# Altium PCB Drone F450.PcbDoc
Units mil, origin at the board's own origin, x right, y up, seen from the top; angles counter-clockwise.
Board outline 3920 x 3920 mil, 2 copper layers (Top Layer, Bottom Layer); 17 components, 17 nets, 113 pads, 52 vias.
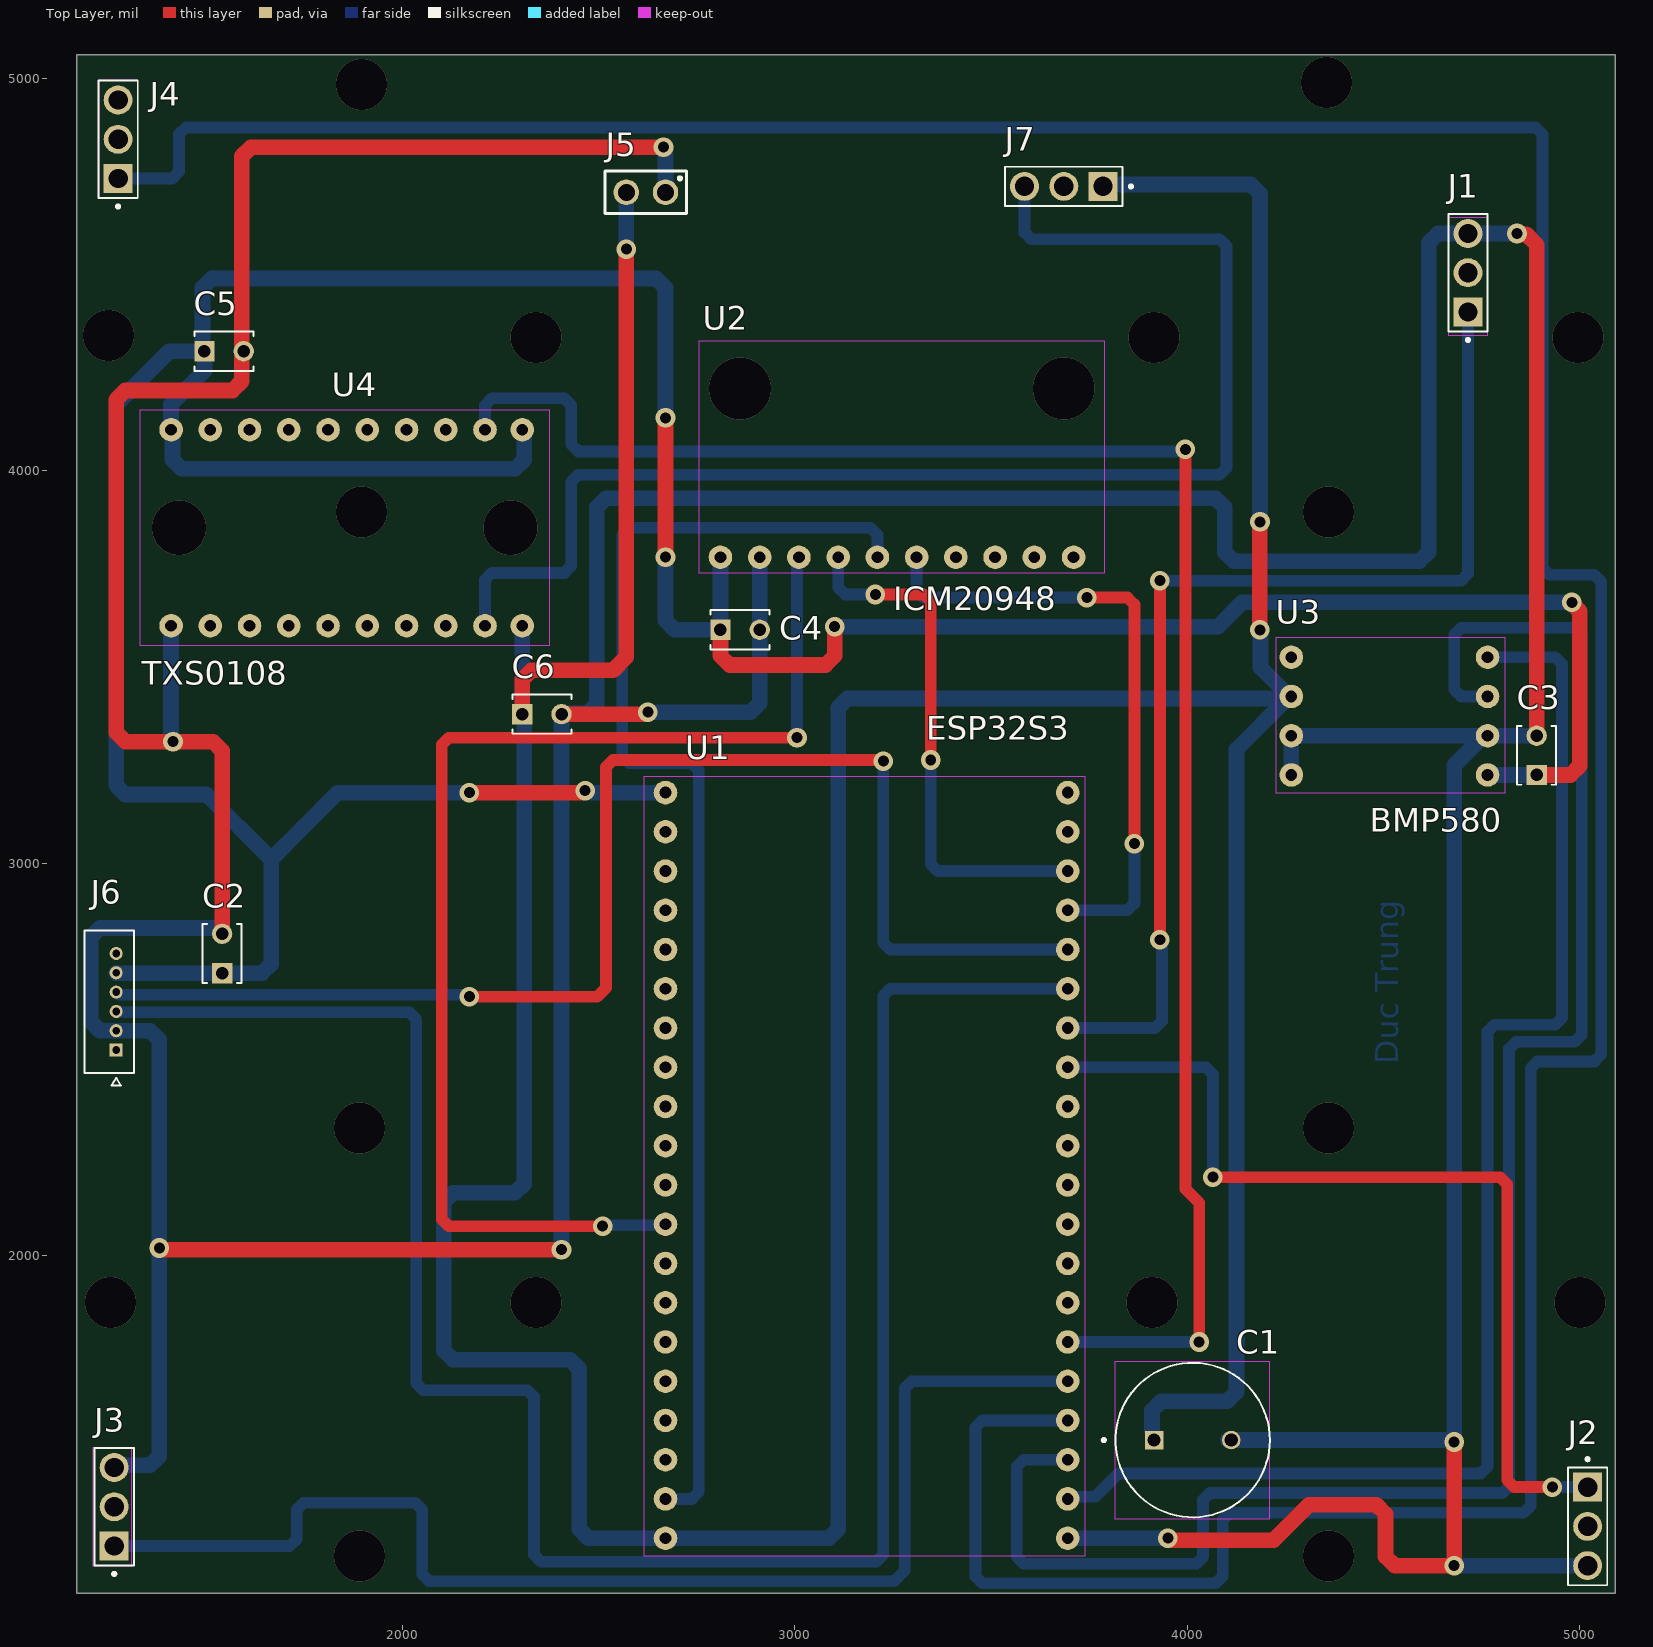
[diagram p0: Top Layer view]
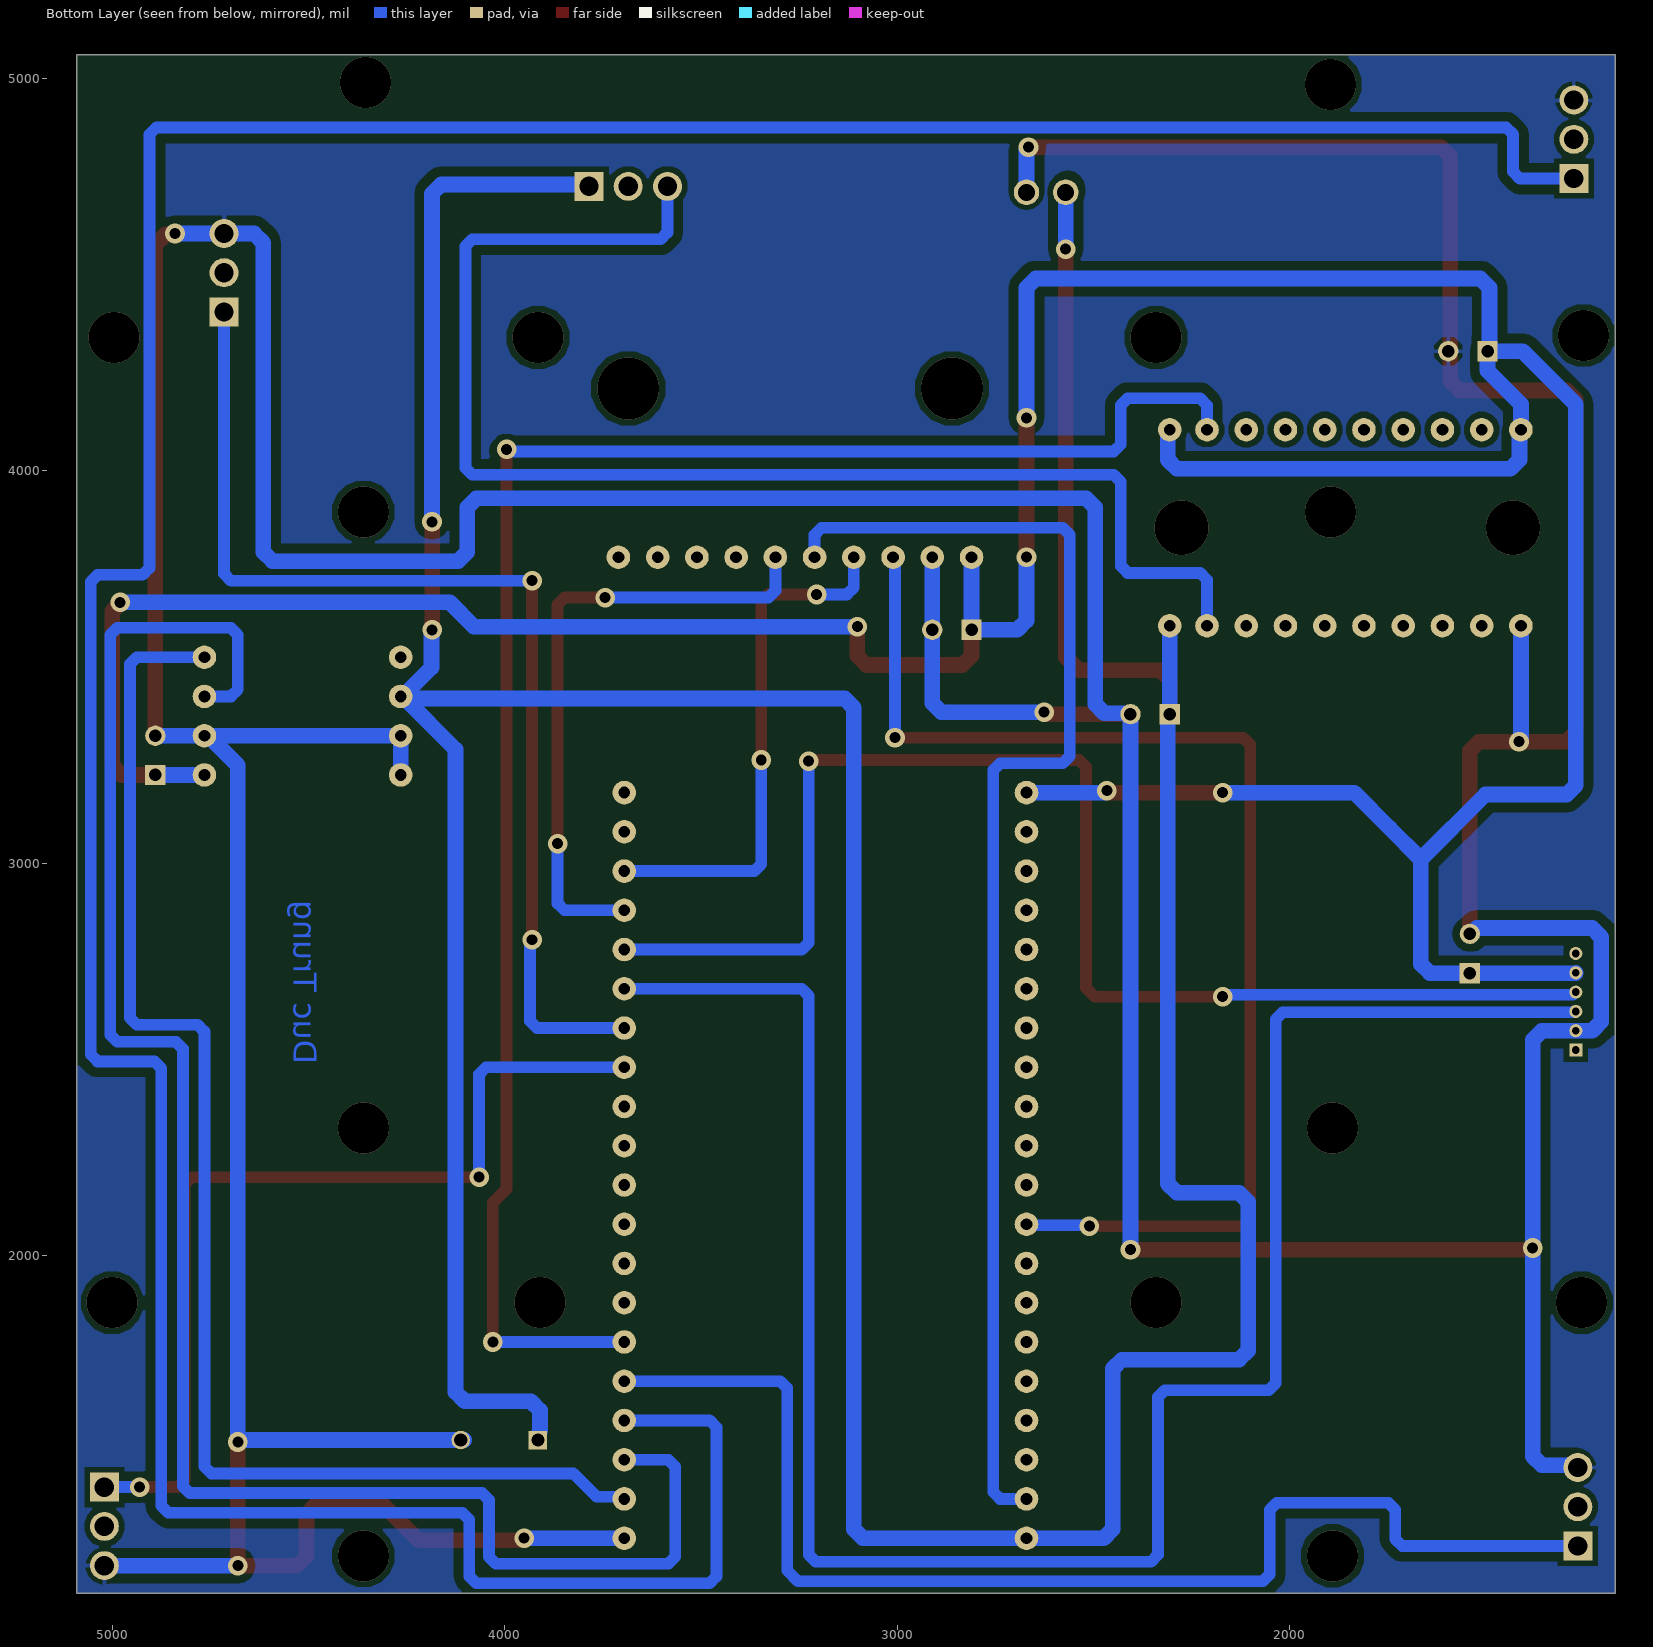
[diagram p1: Bottom Layer view, seen from below]
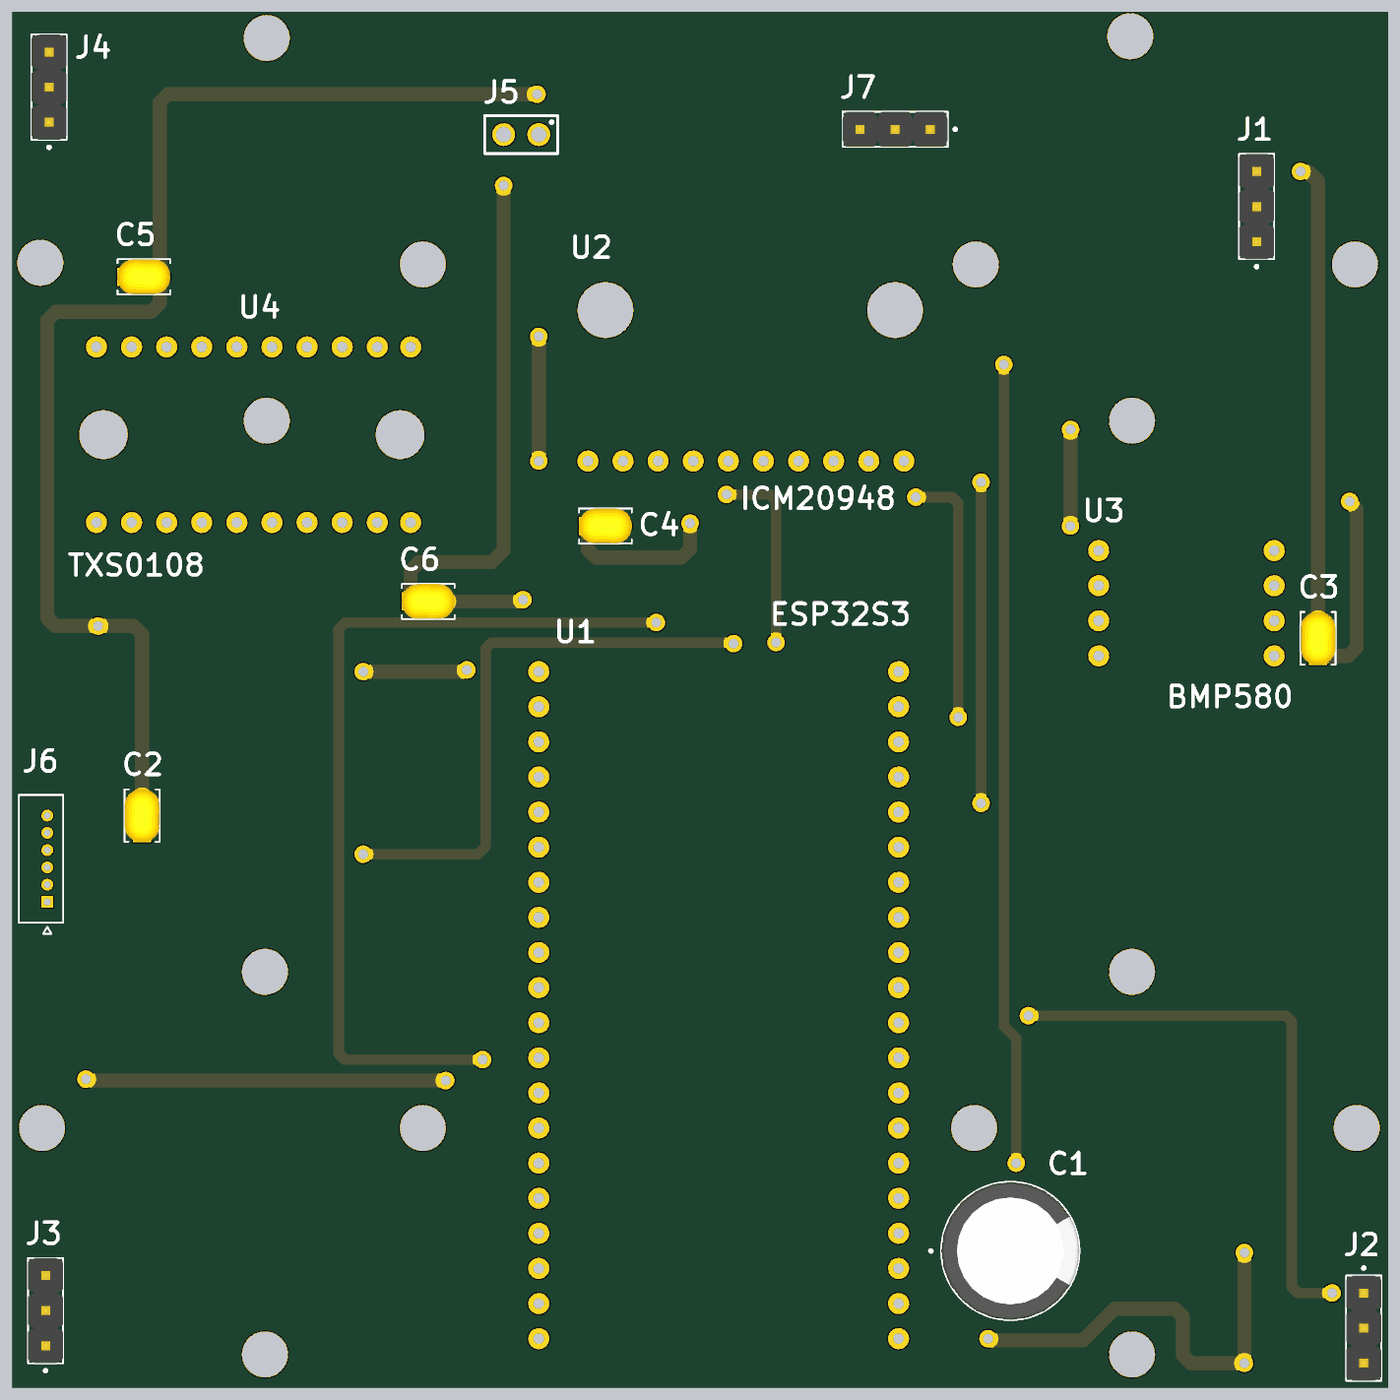
[diagram p2: 3D render of the assembled board from above, using the file's embedded part models]

## Layer stack, top to bottom
Top Solder: solder mask 0.4, Solder Resist, Dk 3.5
Top Layer: signal copper 1.4
Dielectric 1: dielectric 12.6, FR-4, Dk 4.8
Bottom Layer: signal copper 1.4
Bottom Solder: solder mask 0.4, Solder Resist, Dk 3.5

## Board outline
1170,1140 5090,1140 5090,5060 1170,5060

## Design rules (kind name [scope] priority, off if disabled: settings)
Clearance [All] p1: gap=10 ignorepadtopadclearanceinfootprint=FALSE except(15: SMDPad-Fill SMDPad-Poly SMDPad-Region THPad-Fill THPad-Poly THPad-Region Via-Fill Via-Poly Via-Region Fill-Fill Fill-Poly Fill-Region Poly-Poly Poly-Region Region-Region; 25: Arc-Fill Arc-Poly Arc-Region Track-Fill Track-Poly Track-Region)
PolygonConnect [All] p1: connectstyle=Relief reliefconductorwidth=10 reliefentries=4 polygonreliefangle="90 Angle" airgapwidth=10
RoutingTopology SignalI2CTopology [InNet('I2C_*') and InNet('UART_*')] p1: topology=Daisy_Simple
RoutingTopology SignalSPITopology [InNet('SPI_*')] p2: topology=Starburst
RoutingTopology PowerTopology [InNet('GND') OR InNet('+5') OR InNet('+3.3')] p3: topology=Starburst
RoutingVias [All] p1: holewidth=28 width=50 viastyle="Through Hole" minholewidth=28 minwidth=50 maxholewidth=28 maxwidth=50
SolderMaskExpansion [All] p1: expansion=4 istentingtop=FALSE
Width SignalRoute [Not(InNet('GND') OR InNet('+5') OR InNet('+3.3'))] p1: maxlimit=30 minlimit=30 preferedwidth=30
Width PowerRoute [InNet('GND') OR InNet('+5') OR InNet('+3.3')] p2: maxlimit=40 minlimit=40 preferedwidth=40
29 further rules are at their usual default settings.

## Components (designator, comment, footprint, x,y, rotation, side; value= is the part's Value field where it differs from the comment)
C1 "C01" CAPPRD500W60D1000H1250 4013.43,1530 r0 top
C2 "C02" CAPRR254W54L381T254H466 1540,2770 r90 top
C3 "C03" CAPRR254W54L381T254H466 4890,3275 r90 top
C4 "C04" CAPRR254W54L381T254H466 2860,3595 r0 top
C5 "C05" CAPRR254W54L381T254H466 1545,4305 r0 top
C6 "C06" CAPRR254W54L381T254H466 2355,3380 r0 top
J1 "ESC1" WURTH_61300311121 4715,4505 r90 top
J2 "ESC2" WURTH_61300311121 5020,1310 r270 top
J3 "ESC3" WURTH_61300311121 1265,1360 r90 top
J4 "ESC4" WURTH_61300311121 1275,4845 r90 top
J5 "Nguồn 5V" 61300211121 2620,4710 r180 top
J6 "Beitian BN280" MOLEX_530470610 1270,2523.94 r270 top
J7 "iA6B" WURTH_61300311121 3685,4725 r180 top
U1 "ESP32S3" ESP32S3 3095,2680 r0 top
U2 "ICM20948" ICM20948 2940,4070 r0 top
U3 "BMP580" BMP580 4510,3375 r180 top
U4 "TXS0108" TXS0108 1855,3840 r180 top

## Footprints (in the part's own frame and the unit in brackets; to place one, negate y for a bottom-side part, rotate by r counter-clockwise, add the part's x,y. Pads: shape width x height; smd on the part's side, far side on the other; paste and mask are expansions set on the pad)
61300211121 [mm]
  round 1.65 hole 1.1: 1(-1.27,0) 2(1.27,0)
  silkscreen extent -2.64,-1.37 2.64,1.37
BMP580 [mil]
  round 60 hole 30: 1(-255,150) 2(-255,50) 3(-255,-50) 4(-255,-150) 5(245,150) 6(245,50) 7(245,-50) 8(245,-150)
CAPPRD500W60D1000H1250 [mm]
  round 1.2 hole 0.85: N(2.5,0)
  rect 1.2x1.2 hole 0.85: P(-2.5,0)
  silkscreen extent -5.85,-5 5,5, body extent -5,-5 5,5, height 12.5
CAPRR254W54L381T254H466 [mm]
  rect 1.318x1.318 / inner round 1.318 / far side rect 1.318x1.318 hole 0.81: 1(-1.27,0)
  round 1.318 hole 0.81: 2(1.27,0)
  silkscreen extent -1.91,-1.27 1.91,1.27, body extent -1.91,-1.27 1.91,1.27, height 4.66
ESP32S3 [mil]
  round 60 hole 30: 1(600,500) 2(600,400) 3(600,300) 4(600,200) 5(600,100) 6(600,0) 7(600,-100) 8(600,-200) 9(600,-300) 10(600,-400) 11(600,-500) 12(600,-600) 13(600,-700) 14(600,-800) 15(600,-900) 16(600,-1000) 17(600,-1100) 18(600,-1200) 19(600,-1300) 20(600,-1400) 21(-425,500) 22(-425,400) 23(-425,300) 24(-425,200) 25(-425,100) 26(-425,0) 27(-425,-100) 28(-425,-200) 29(-425,-300) 30(-425,-400) 31(-425,-500) 32(-425,-600) 33(-425,-700) 34(-425,-800) 35(-425,-900) 36(-425,-1000) 37(-425,-1100) 38(-425,-1200) 39(-425,-1300) 40(-425,-1400)
ICM20948 [mil]
  round 60 hole 30: 1(-130,-290) 2(-30,-290) 3(70,-290) 4(170,-290) 5(270,-290) 6(370,-290) 7(470,-290) 8(570,-290) 9(670,-290) 10(770,-290)
MOLEX_530470610 [mm]
  rect 0.85x0.85 / inner round 0.85 / far side rect 0.85x0.85 hole 0.5 mask+0.076: 1(0,0)
  round 0.85 hole 0.5 mask+0.076: 2(-1.25,0) 3(-2.5,0) 4(-3.75,0) 5(-5,0) 6(-6.25,0)
  silkscreen extent -7.75,-2.05 2.3,1.15
TXS0108 [mil]
  round 60 hole 30: 1(-450,-265) 2(-355,-265) 3(-255,-265) 4(-155,-265) 5(-55,-265) 6(45,-265) 7(145,-265) 8(245,-265) 9(345,-265) 10(445,-265) 11(-450,235) 12(-355,235) 13(-255,235) 14(-155,235) 15(-55,235) 16(45,235) 17(145,235) 18(245,235) 19(345,235) 20(445,235)
WURTH_61300311121 [mm]
  rect 1.875x1.875 / inner round 1.875 / far side rect 1.875x1.875 hole 1.25: 1(-2.54,0)
  round 1.875 hole 1.25: 2(0,0) 3(2.54,0)
  silkscreen extent -4.45,-1.27 3.81,1.27, body extent -3.81,-1.27 3.81,1.27, height 7.27

## Part data
C1: library part EEUFK1E471B, "CAP ALUM 470UF 20% 25V RADIAL TH", Package="RADIAL-2 Panasonic", Availability="In Stock", Check_prices=https://www.snapeda.com/parts/EEUFK1E471B/Panasonic/view-part/?ref=eda, MF=Panasonic, MP=EEUFK1E471B, Price=None, SnapEDA_Link=https://www.snapeda.com/parts/EEUFK1E471B/Panasonic/view-part/?ref=snap
C2 C3 C4 C5 C6: library part C315C104K1R5TA, "315 C 100nF Ceramic Multilayer Capacitor, 100 VDC, +125degC, X7R Dielec, +/-10%", Package="Radial Kemet", Check_prices=https://www.snapeda.com/parts/C315C104K1R5TA/KEMET/view-part/?ref=eda, MF=KEMET, MP=C315C104K1R5TA, SnapEDA_Link=https://www.snapeda.com/parts/C315C104K1R5TA/KEMET/view-part/?ref=snap
J1 J2 J3 J4: library part 61300311121, Package=None, Availability=Unavailable, MP=61300311121, Price=None
J5: library part 6130XX11121_61300211121, Package=None, Availability=Unavailable, MF="{'manufacturer': u'Wurth Electronics'}", MP=61300211121, Price=None
J6: library part 530470610, "Connector Header Through Hole 6 position 0.049 (1.25mm)", Package=None, Check_prices=https://www.snapeda.com/parts/530470610/Molex/view-part/?ref=eda, Digi-Key_Part_Number=WM1735-ND, MF=Molex, MP=530470610, Purchase-URL=https://pricing.snapeda.com/search/part/530470610/?ref=eda, SnapEDA_Link=https://www.snapeda.com/parts/530470610/Molex/view-part/?ref=snap
J7: library part 61300311121, "Receiver for FC", Package=None, Availability=Unavailable, MP=61300311121, Price=None

## Via types
v1: diameter 50, hole 28, Top Layer to Bottom Layer, 32 vias
v2: diameter 129.92, hole 129.92, Top Layer to Bottom Layer, 16 vias
v3: diameter 157.48, hole 157.48, Top Layer to Bottom Layer, 2 vias
v4: diameter 137.8, hole 137.8, Top Layer to Bottom Layer, 2 vias

## Nets (pads, with @x,y where several pads share a name; then routed paths per layer and width w, separated by ;. In a path a pad name is that pad's centre, name@x,y a point inside that pad or via, vN(x,y) a via of type N, cw(c..) or ccw(c..) an arc to the next point about the centre after c; other vN are vias at no path point)
+3.3: C2.1 C3.1 C4.1 C5.1 J6.5 U1.21 U2.1 U3.1 U4.1 U4.10 | length 10338.9
  Top Layer w40: v1(2170,3180) 2457.29,3180 2462.29,3185 v1(2465,3185) ; v1(2670,3780) v1(2670,4135) ; C4.1 2810,3528.43 2833.43,3505 3077.57,3505 3101,3528.43 v1(3101,3603) ; C3.1 4976.57,3225 5000,3248.43 5000,3642.29 4980,3662.29 v1(4980,3665)
  Bottom Layer w40: J6.5 1270.79,2720 C2.1 1641.57,2720 1665,2743.43 1665,3010 ; v1(2170,3180) 1835,3180 1744.57,3089.57 1665,3010 ; U4.1 2308.83,4101.17 2308.83,4087.03 2310,4085.86 2310,4028.43 2286.57,4005 1437.26,4005 1413.83,4028.43 1413.83,4101.17 U4.10 1410,4170 1495,4255 C5.1 C5.1@1490,4305 ; v1(2465,3185) 2467.71,3185 2472.71,3180 U1.21 ; v1(2670,3780) 2670,3618.43 2693.43,3595 C4.1 U2.1 ; v1(2670,4135) 2670,4466.57 2646.57,4490 1513.43,4490 1490,4466.57 C5.1@1490,4305 ; v1(3101,3603) 4078,3603 4140,3665 v1(4980,3665) ; U3.1 C3.1@4875,3225 ; C5.1@1490,4305 1405,4305 1270,4170 1270,3198.43 1293.43,3175 1500,3175 1665,3010
+5: C1.P C6.1 J5.2 J7.1 U1.40 U3.7 U4.11 | length 12182.2
  Top Layer w40: C6.1 2305,3468.53 2328.43,3491.96 2536.57,3491.96 2570,3525.39 v1(2570,4565) ; v1(4184.63,3594.87) 4184.63,3599.31 4184.81,3599.49 4184.81,3869.81 v1(4185,3870)
  Bottom Layer w40: U4.11 C6.1 2310,3375 2310,2183.43 2286.57,2160 2128.43,2160 2105,2136.57 2105,1758.43 2128.43,1735 2426.57,1735 2450,1711.57 2450,1303.43 2473.43,1280 U1.40 3086.57,1280 3110,1303.43 3110,3396.57 3133.43,3420 U3.7@4245,3420 ; J5.2@2565,4710 2565,4720 2570,4715 J5.2 v1(2570,4565) ; J7.1@3773.36,4730 4161.57,4730 4185,4706.57 v1(4185,3870) ; C1.P 3911.38,1533.62 3911.38,1552.58 3910,1553.96 3910,1605.32 3933.43,1628.75 4101.57,1628.75 4125,1652.18 4125,3290 4255.97,3420.97 4255.97,3424.79 4255.76,3425 U3.7@4260,3425 ; v1(4184.63,3594.87) 4186.17,3593.33 4186.17,3498.83 U3.7@4260,3425 ; U3.7 U3.7@4260,3425
GND: C1.N C2.2 C3.2 C4.2 C5.2 C6.2 J1.3 J2.3 J3.3 J4.3 J5.1 J6.2 U1.20 U2.2 U3.2 U3.5 U3.6 U4.20 | length 19400.4
  Top Layer w40: v1(1380,2019.32) 1381.91,2017.4 1388.98,2017.4 1391.39,2015 v1(2405,2015) ; C2.2 1540,3030 1540,3286.57 1516.57,3310 v1(1415,3310) 1293.43,3310 1270,3333.43 1270,4181.57 1293.43,4205 1566.57,4205 1590,4228.43 1590,4291.59 1592.73,4294.32 C5.2@1592.73,4302.27 ; C5.2 1592.73,4302.73 C5.2@1592.73,4302.27 ; C6.2 2617.29,3380 2622.29,3385 v1(2625,3385) ; v1(2665,4825) 1613.43,4825 1590,4801.57 1590,4305 C5.2@1592.73,4302.27 ; v1(3950,1280) 3951.91,1278.09 3954.62,1278.09 3957.71,1275 4220,1275 4310,1365 4481.57,1365 4505,1341.57 4505,1233.43 4528.43,1210 v1(4680,1210) v1(4680,1525) ; v1(4840,4605) 4841.91,4603.09 4863.48,4603.09 4890,4576.57 C3.2
  Bottom Layer w40: J3.3 1270.48,1465.48 1356.57,1465.48 1380,1488.91 v1(1380,2019.32) 1380,2549.72 1356.57,2573.15 J6.2 1228.43,2573.15 1205,2596.58 1205,2811.57 1228.43,2835 1521.78,2835 1536.78,2820 C2.2 ; U4.20 1410,3317.71 1415,3312.71 v1(1415,3310) ; v1(2405,2015) C6.2 2407.27,3382.27 2471.57,3382.27 2495,3405.71 2495,3906.57 2518.43,3930 4071.57,3930 4095,3906.57 4095,3793.43 4118.43,3770 4591.57,3770 4615,3793.43 4615,4581.57 4638.43,4605 J1.3 v1(4840,4605) ; v1(2625,3385) 2886.57,3385 2910,3408.43 C4.2 U2.2 ; v1(2665,4825) 2665,4822.29 2670,4817.29 J5.1 ; U1.20 v1(3950,1280) ; C1.N@4103.42,1530 C1.N 4672.29,1530 4677.29,1525 v1(4680,1525) ; U3.5 U3.6 U3.2@4755.76,3325 ; v1@4676.57,1530 4680,1533.43 4680,3250 4745,3315 4749.59,3315 4755.76,3321.17 U3.2@4755.76,3325 ; v1(4680,1210) J2.3 ; C3.2 U3.2 U3.2@4755.76,3325
I2C_SCL: U1.18 U3.3 | length 4702.1
  Bottom Layer w30: U1.18 3582.57,1480 3565,1462.43 3565,1232.57 3582.57,1215 4022.43,1215 4040,1232.57 4040,1377.43 4057.57,1395 4802.43,1395 4820,1412.57 4820,2527.43 4837.57,2545 4987.43,2545 5005,2562.57 5005,3582.43 4987.43,3600 4697.57,3600 4680,3582.43 4680,3442.57 4697.57,3425 U3.3
I2C_SDA: U1.19 U3.4 | length 3515.7
  Bottom Layer w30: U1.19 3700.74,1385.74 3765.74,1385.74 3825,1445 4747.43,1445 4765,1462.57 4765,2570.85 4782.57,2588.43 4937.43,2588.43 4955,2606 4955,3507.43 4937.43,3525 U3.4
NetJ1_1: J1.1 U1.7 | length 2849.3
  Top Layer w30: v1(3930,2805) v1(3930,3720)
  Bottom Layer w30: U1.7 3917.43,2580 3935,2597.57 3935,2785.86 3933.83,2787.03 3933.83,2801.17 v1(3930,2805) ; v1(3930,3720) 4697.43,3720 4715,3737.57 J1.1@4715,4422.77
NetJ2_1: J2.1 U1.8 | length 2364.1
  Top Layer w30: v1(4065,2200) 4797.43,2200 4815,2182.43 4815,1427.57 4832.57,1410 v1(4930,1410)
  Bottom Layer w30: U1.8 4047.43,2480 4065,2462.43 v1(4065,2200) ; v1(4930,1410) J2.1
NetJ3_1: J3.1 U1.16 | length 3182.4
  Bottom Layer w30: J3.1 1712.43,1260 1730,1277.57 1730,1352.43 1747.57,1370 2032.43,1370 2050,1352.43 2050,1187.57 2067.57,1170 3252.43,1170 3280,1197.57 3280,1662.43 3297.57,1680 U1.16
NetJ4_1: J4.1 U1.17 | length 9741.5
  Bottom Layer w30: J4.1 1412.43,4745 1430,4762.57 1430,4857.43 1447.57,4875 4887.43,4875 4905,4857.43 4905,3752.57 4922.57,3735 5037.43,3735 5055,3717.43 5055,2512.57 5037.43,2495 4892.57,2495 4875,2477.43 4875,1362.57 4857.43,1345 4107.57,1345 4090,1327.43 4090,1182.57 4072.43,1165 3477.57,1165 3460,1182.57 3460,1562.43 3477.57,1580 U1.17
NetJ7_3: J7.3 U4.12 | length 3463.2
  Bottom Layer w30: U4.12 2210,3722.43 2227.57,3740 2412.43,3740 2430,3757.57 2430,3972.43 2447.57,3990 4082.43,3990 4100,4007.57 4100,4572.43 4082.43,4590 3602.57,4590 3585,4607.57 J7.3
NetU1_15: U1.15 U4.2 | length 4599
  Top Layer w30: v1(3995,4055) 3995,2170 4030,2135 v1(4030,1780)
  Bottom Layer w30: U4.2 2210,4167.43 2227.57,4185 2412.43,4185 2430,4167.43 2430,4067.16 2447.57,4049.59 v1@4000,4049.59 ; U1.15 v1(4030,1780)
SPI_CS: U1.39 U2.5 | length 3428.5
  Bottom Layer w30: U1.39 2737.43,1380 2755,1397.57 2755,3237.43 2737.43,3255 2577.57,3255 2560,3272.57 2560,3837.43 2577.57,3855 3192.43,3855 3210,3837.43 U2.5
SPI_MISO: U1.4 U2.6 | length 1594.1
  Top Layer w30: v1(3744,3677) 3847.43,3677 3865,3659.43 v1(3865,3050)
  Bottom Layer w30: U2.6 3310,3694.57 3327.57,3677 v1(3744,3677) ; U1.4 3847.43,2880 3865,2897.57 v1(3865,3050)
SPI_MOSI: U1.3 U2.4 | length 1354.1
  Top Layer w30: v1(3205,3685) 3328.43,3685 3346,3667.43 v1(3346,3263)
  Bottom Layer w30: U2.4 3110,3702.57 3127.57,3685 v1(3205,3685) ; v1(3346,3263) 3346,2997.57 3363.57,2980 U1.3
SPI_SCK: U1.32 U2.3 | length 3163.6
  Top Layer w30: v1(2510,2075) 2117.57,2075 2100,2092.57 2100,3302.43 2117.57,3320 v1(3005,3320)
  Bottom Layer w30: v1(2510,2075) 2512.5,2077.5 2667.5,2077.5 U1.32 ; v1(3005,3320) 3005,3775 U2.3
UART_RX: J6.4 U1.5 | length 3480.2
  Top Layer w30: v1(2170,2660) 2495.85,2660 2518.42,2682.57 2518.42,3245.43 2536,3263 3222,3263 v1(3225,3260)
  Bottom Layer w30: J6.4 1270.94,2671.57 1277.51,2665 2150.86,2665 2152.03,2663.83 2166.17,2663.83 v1(2170,2660) ; v1(3225,3260) 3225,2797.57 3242.57,2780 U1.5
UART_TX: J6.3 U1.6 | length 5224.2
  Bottom Layer w30: J6.3 1270.94,2622.36 1273.3,2620 2017.43,2620 2035,2602.43 2035,1674.56 2052.57,1656.98 2317.43,1656.98 2335,1639.41 2335,1237.57 2352.57,1220 3207.43,1220 3225,1237.57 3225,2662.43 3242.57,2680 U1.6
pads on no net: J1.2 J2.2 J3.2 J4.2 J6.1 J6.6 J7.2 U1.1 U1.2 U1.9 U1.10 U1.11 U1.12 U1.13 U1.14 U1.22 U1.23 U1.24 U1.25 U1.26 U1.27 U1.28 U1.29 U1.30 U1.31 U1.33 U1.34 U1.35 U1.36 U1.37 U1.38 U2.7 U2.8 U2.9 U2.10 U3.8 U4.3 U4.4 U4.5 U4.6 U4.7 U4.8 U4.9 U4.13 U4.14 U4.15 U4.16 U4.17 U4.18 U4.19
copper on no net:
  other v2: 1890,1235 4360,1235 1255,1880 2340,1880 3910,1880 5000,1880 1890,2325 4360,2325 1895,3895 4360,3895 2340,4340 3915,4340 4995,4340 1250,4345 1895,4985 4355,4990
  other v3: 2860,4210 3685,4210
  other v4: 1430,3855 2275,3855

## Polygon pours and split planes (outlines as drawn)
GND on Bottom Layer "NONET_L-01_P-001" (solid, remove dead copper, pour order 0): 1170,5057.5 1170,1140 5090,1140 5090,5057.5

## Keep-outs
Top Layer:
  rectangle: 1225,4695 1325,4995
  rectangle: 1210,1210 1310,1510
  rectangle: 3535,4675 3835,4775
  rectangle: 4665,4345 4765,4645
  rectangle: 3815,1330 4210,1730
  rectangle: 4225,3180 4810,3575
  rectangle: 2755,3740 3790,4330
  rectangle: 1330,3555 2375,4155
  rectangle: 2615,1235 3740,3220

## Other copper
Bottom Layer:
  text "Duc Trung" at 4556.13,2487.49 h100 r90